# Altium PCB ledbrick.PcbDoc
Units mm, origin at the board's own origin, x right, y up, seen from the top; angles counter-clockwise.
Board outline 81 x 80.5 mm, 2 copper layers (Component Side, Bottom Layer), stack 0.325 mm thick; 43 components, 85 nets, 165 pads, 0 vias.
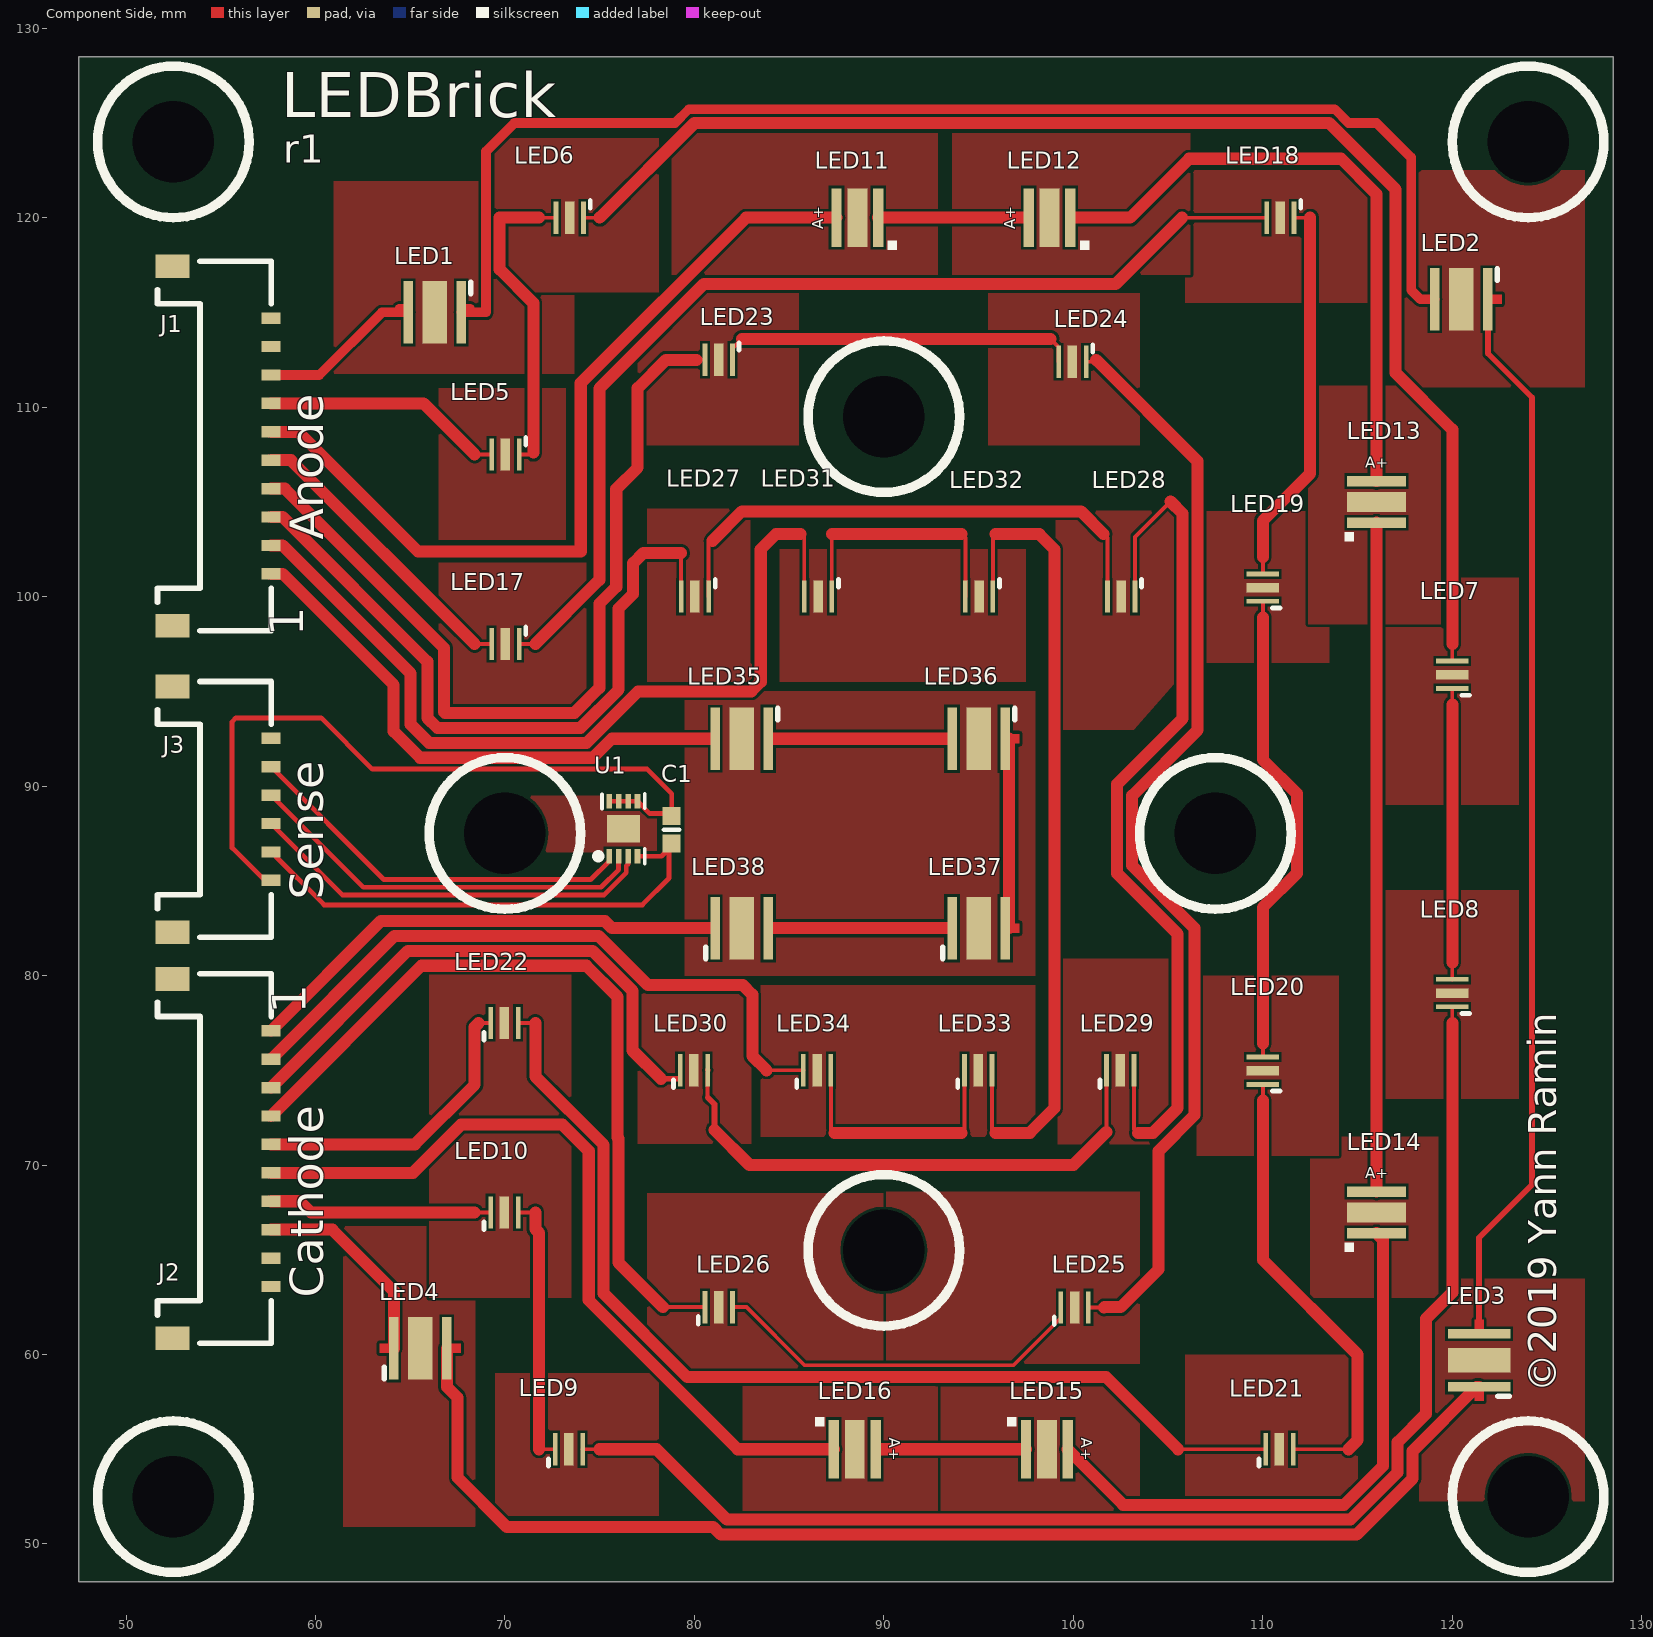
[diagram p0: Component Side view]
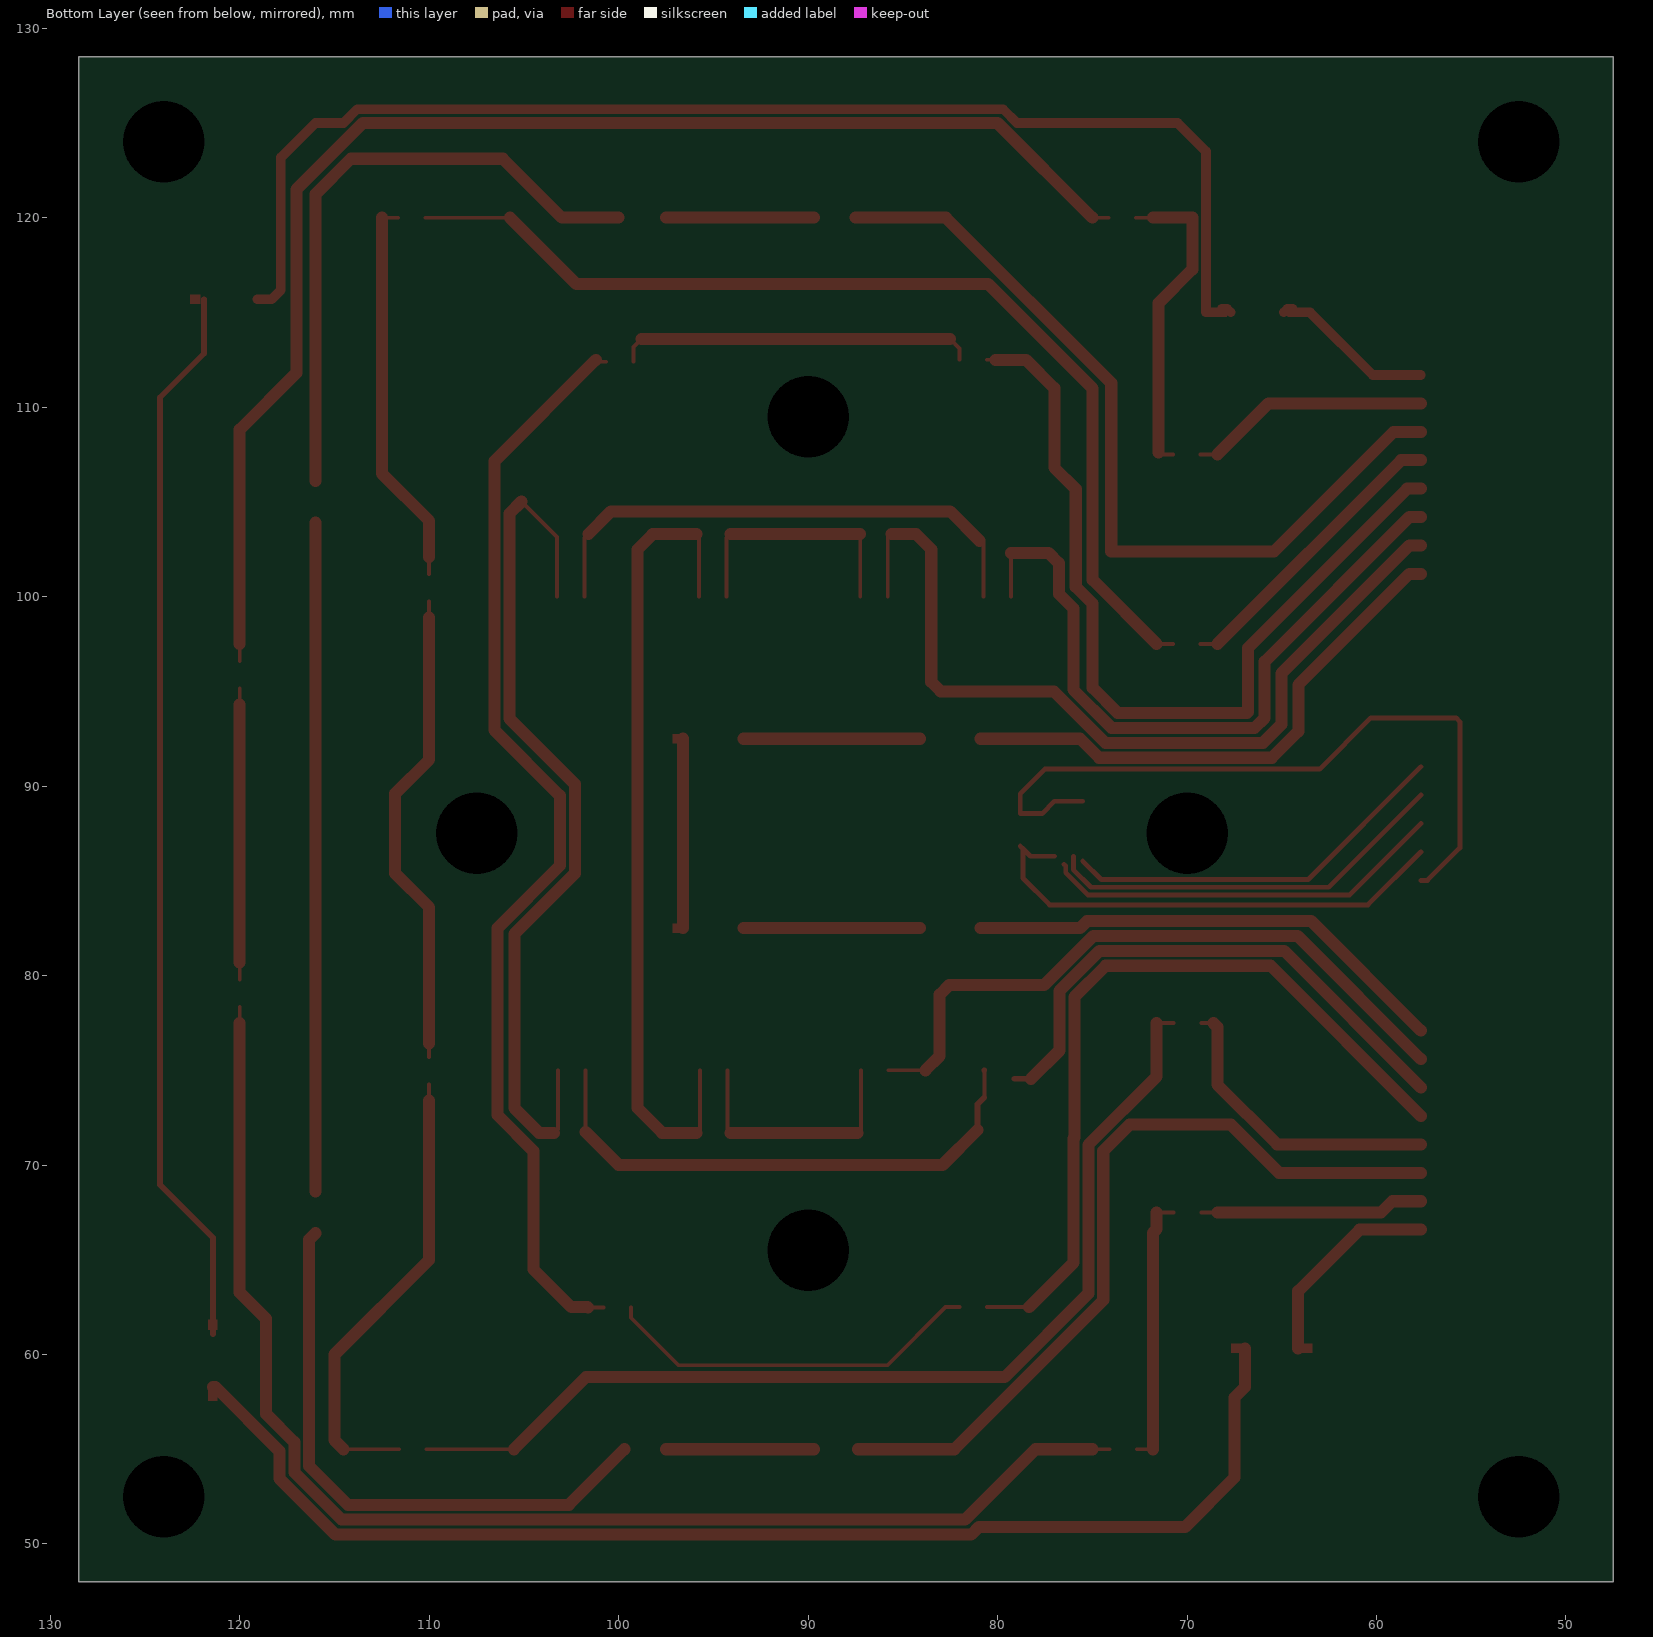
[diagram p1: Bottom Layer view, seen from below]
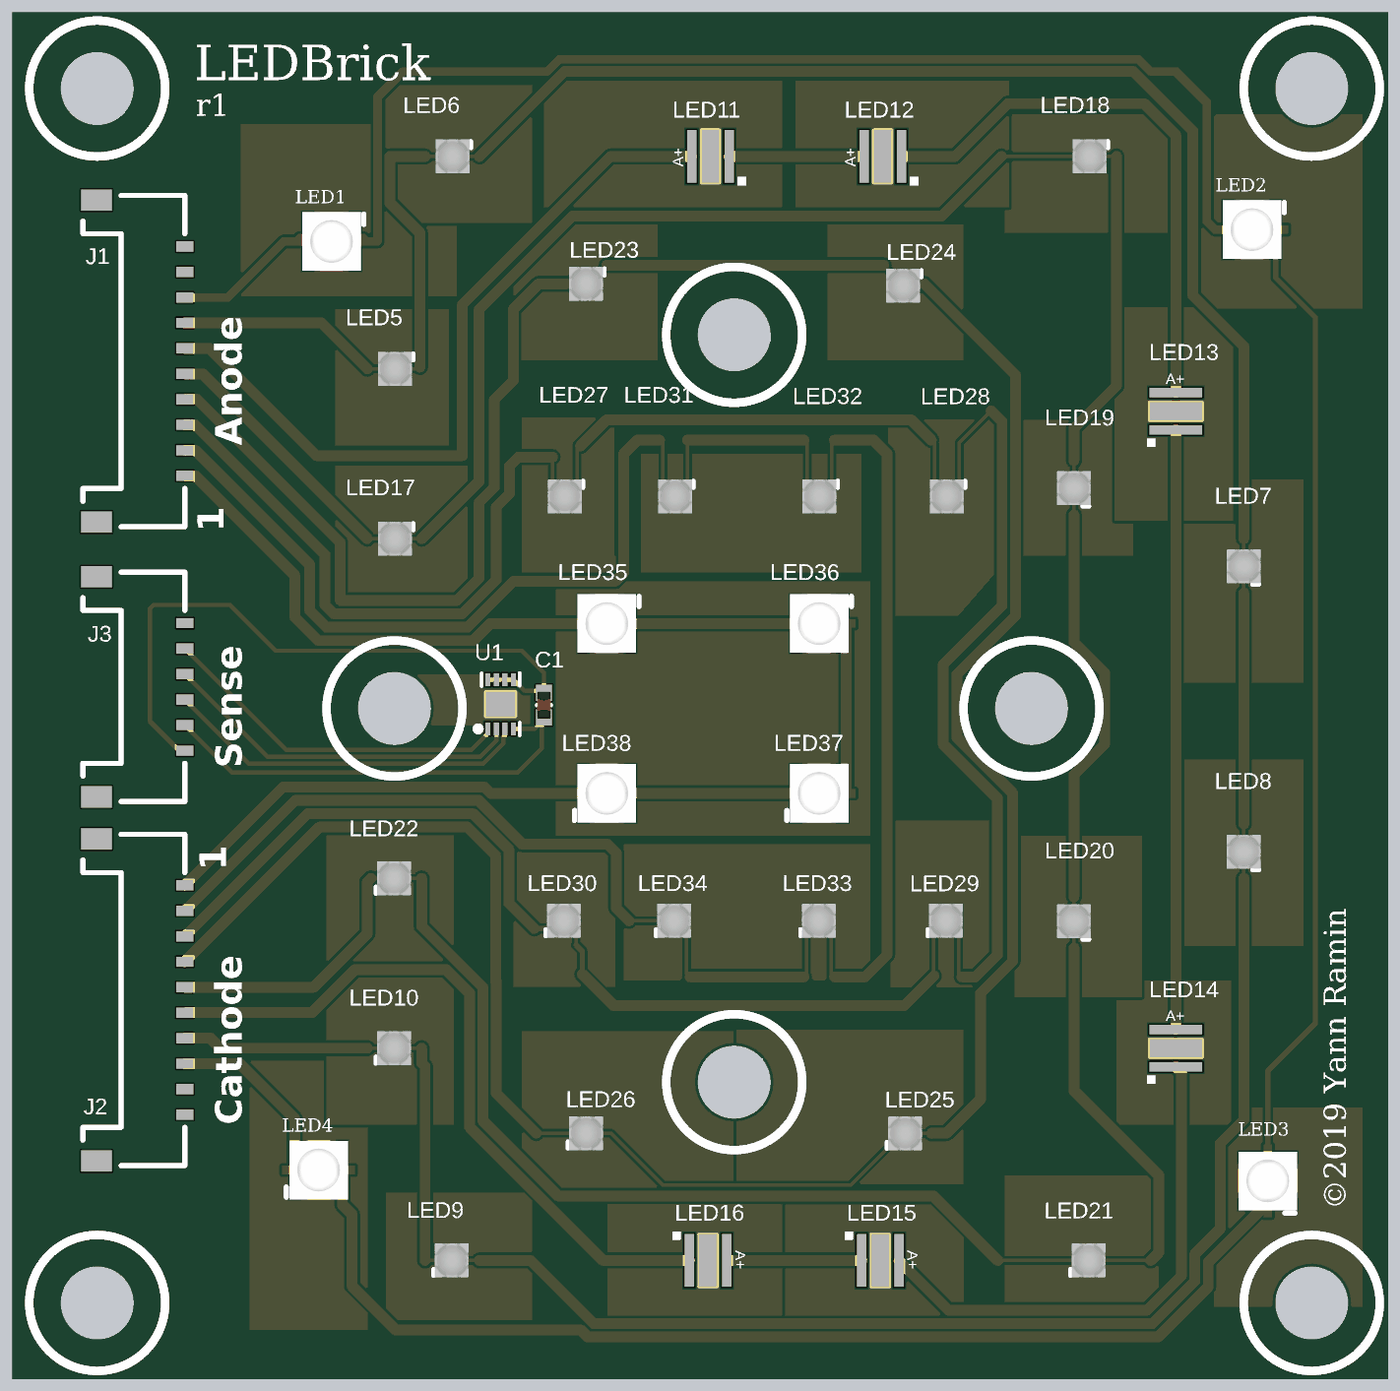
[diagram p2: 3D render of the assembled board from above, using the file's embedded part models]

## Layer stack, top to bottom
Top Solder: solder mask 0.0102, Solder Resist, Dk 3.5
Component Side: signal copper 0.0356
Dielectric 1: core 0.254, FR-4, Dk 4.2
Bottom Layer: signal copper 0.0356
Solder Side: solder mask 0.0102, Solder Resist, Dk 3.5

## Board outline
47.5,48 128.5,48 128.5,128.5 47.5,128.5

## Design rules (kind name [scope] priority, off if disabled: settings)
Clearance [All] p1: gap=0.152 ignorepadtopadclearanceinfootprint=FALSE
NetAntennae NetAntennae_thermal [InNetClass('Thermal')] p1: netantennaetolerance=12.7
NetAntennae [All] p2: netantennaetolerance=0
PolygonConnect DirectThermalPoly [InNetClass('Thermal')] p1: connectstyle=Direct reliefconductorwidth=0.254 reliefentries=4 polygonreliefangle="90 Angle" airgapwidth=0.254
PolygonConnect [All] p2: connectstyle=Relief reliefconductorwidth=0.254 reliefentries=4 polygonreliefangle="90 Angle" airgapwidth=0.254
RoutingVias [All] p1: holewidth=0.711 width=1.27 viastyle="Through Hole" minholewidth=0.711 minwidth=1.27 maxholewidth=0.711 maxwidth=1.27
SolderMaskExpansion [All] p1: expansion=0.102
Width [All] p1: maxlimit=2.54 minlimit=0.203 preferedwidth=0.508 bottomlayer_maxwidth=0.254 bottomlayer_prefwidth=0.254 minimp=50.000000 maximp=50.000000 favimp=50.000000
29 further rules are at their usual default settings.

## Classes and differential pairs
net class Thermal: L1T L2T L3T L4T L5T L6T LT7 LT8 LT9 LT10 LT11 LT12 LT13 LT14 LT15 LT16 LT17 LT18 LT19 LT20 LT21 LT22 LT23 LT24 LT25 LT26 LT27 LT28 LT29 LT30 LT31 LT33 LTG SENSETHERM

## Components (designator, comment, footprint, x,y, rotation, side; value= is the part's Value field where it differs from the comment)
C1 "0.1uF" C0603 78.8,87.7 r270 top
J1 "504050-1091_PICOLOCK" 504050-1091_PICOLOCK 57.658,107.95 r90 top
J2 "504050-1091_PICOLOCK" 504050-1091_PICOLOCK 57.658,70.339 r90 top
J3 "504050-0691_PICOLOCK" 504050-0691_PICOLOCK 57.658,88.773 r90 top
LED1 "Violet" SEMILED_3535 66.294,115 r0 top
LED2 "Violet" SEMILED_3535 120.479,115.697 r0 top
LED3 "Violet" SEMILED_3535 121.412,59.69 r270 top
LED4 "Violet" SEMILED_3535 65.532,60.325 r180 top
LED5 "C_RB" LUXEON_C 70,107.5 r0 top
LED6 "C_RB" LUXEON_C 73.4,120 r0 top
LED7 "C_RB" LUXEON_C 120,95.9 r270 top
LED8 "C_RB" LUXEON_C 120,79.1 r270 top
LED9 "C_RB" LUXEON_C 73.4,55 r180 top
LED10 "C_RB" LUXEON_C 70,67.5 r180 top
LED11 "Square DeepBlue" OSRAM_OSLON_SQUARE 88.6,120 r180 top
LED12 "Square DeepBlue" OSRAM_OSLON_SQUARE 98.74,120 r180 top
LED13 "Square DeepBlue" OSRAM_OSLON_SQUARE 116,105 r90 top
LED14 "Square DeepBlue" OSRAM_OSLON_SQUARE 116,67.5 r90 top
LED15 "Square DeepBlue" OSRAM_OSLON_SQUARE 98.6,55 r0 top
LED16 "Square DeepBlue" OSRAM_OSLON_SQUARE 88.46,55 r0 top
LED17 "LED_THERMAL" LUXEON_C 70,97.5 r0 top
LED18 "LED_THERMAL" LUXEON_C 110.9,120 r0 top
LED19 "LED_THERMAL" LUXEON_C 110,100.5 r270 top
LED20 "LED_THERMAL" LUXEON_C 110,75 r270 top
LED21 "LED_THERMAL" LUXEON_C 110.9,55 r180 top
LED22 "LED_THERMAL" LUXEON_C 70,77.5 r180 top
LED23 "C_MINT" LUXEON_C 81.255,112.5 r0 top
LED24 "C_MINT" LUXEON_C 99.924,112.395 r0 top
LED25 "C_MINT" LUXEON_C 100.089,62.484 r180 top
LED26 "C_MINT" LUXEON_C 81.305,62.5 r180 top
LED27 "C_WHT" LUXEON_C 80,100 r0 top
LED28 "C_WHT" LUXEON_C 102.5,100 r0 top
LED29 "C_WHT" LUXEON_C 102.5,75 r180 top
LED30 "C_WHT" LUXEON_C 80,75 r180 top
LED31 "C_CYAN" LUXEON_C 86.5,100 r0 top
LED32 "C_BLUE" LUXEON_C 95,100 r0 top
LED33 "C_CYAN" LUXEON_C 95,75 r180 top
LED34 "C_BLUE" LUXEON_C 86.5,75 r180 top
LED35 "VIOLET" SEMILED_3535 82.5,92.5 r0 top
LED36 "VIOLET" SEMILED_3535 95,92.5 r0 top
LED37 "VIOLET" SEMILED_3535 95,82.5 r180 top
LED38 "VIOLET" SEMILED_3535 82.5,82.5 r180 top
U1 "MCP9808" DFN8 75.5,86.3 r90 top

## Footprints (in the part's own frame and the unit in brackets; to place one, negate y for a bottom-side part, rotate by r counter-clockwise, add the part's x,y. Pads: shape width x height; smd on the part's side, far side on the other; paste and mask are expansions set on the pad)
504050-0691_PICOLOCK [mm]
  rect 0.6x1 smd: 1(-3.75,0) 2(-2.25,0) 3(-0.75,0) 4(0.75,0) 5(2.25,0) 6(3.75,0)
  rect 1.25x1.8 smd: PAD(-6.48,5.2) PAD(6.48,5.2)
  silkscreen extent -6.75,0 6.75,6
504050-1091_PICOLOCK [mm]
  rect 0.6x1 smd: 1(-6.75,0) 2(-5.25,0) 3(-3.75,0) 4(-2.25,0) 5(-0.75,0) 6(0.75,0) 7(2.25,0) 8(3.75,0) 9(5.25,0) 10(6.75,0)
  rect 1.25x1.8 smd: PAD(-9.48,5.2) PAD(9.48,5.2)
  silkscreen extent -9.75,0 9.75,6
C0603 [mm]
  rect 0.95x0.95 smd: 1(-0.725,0) 2(0.725,0)
  silkscreen extent 0,-0.4 0,0.4, body extent -0.8,-0.4 0.8,0.4, height 0.6
DFN8 [mm]
  rect 0.75x0.3 smd: 1(0,0) 2(0,-0.5) 3(0,-1) 4(0,-1.5) 5(2.9,-1.5) 6(2.9,-1) 7(2.9,-0.5) 8(2.9,0)
  rect 1.45x1.75 smd: PAD(1.45,-0.75)
  silkscreen extent -0.39,-1.88 3.3,0.65
LUXEON_C [mm]
  rect 0.25x1.7 smd mask+0.05: A(-0.7,0) C(0.75,0)
  rect 0.5x1.7 smd mask+0.05: PAD(0.025,0)
  silkscreen extent 1.1,0.5 1.1,0.9, body extent -0.97,-1 1.02,1, height 1.36
OSRAM_OSLON_SQUARE [mm]
  rect 0.55x3.1 smd: A(1.1,0) C(-1.1,0)
  rect 1.05x3.1 smd: PAD(0,0)
  silkscreen extent -2.1,1.2 -1.6,1.7
SEMILED_3535 [mm]
  rect 0.5x3.3 smd: A(-1.4,0) C(1.4,0)
  rect 1.3x3.3 smd: PAD(0,0)
  Component Side region: -2.15,-0.25 -1.6,-0.25 -1.6,0.25 -2.15,0.25
  Component Side region: 1.6,-0.25 2.15,-0.25 2.15,0.25 1.6,0.25
  silkscreen extent 1.9,1 1.9,1.6, body extent -1.73,-1.72 1.72,1.73, height 2.01

## Part data
C1: library part C-EU
LED1 LED2 LED3 LED4 LED5 LED6 LED7 LED8 LED9 LED10 LED11 LED12 LED13 LED14 LED15 LED16 LED23 LED24 LED25 LED26 LED27 LED28 LED29 LED30 LED31 LED32 LED33 LED34 LED35 LED36 LED37 LED38: library part LED_THERMAL

## Free pads (board coordinates)
  rect 0x0 hole 4.3 unplated: ""(52.5,52.5) ""(52.5,124) ""(70,87.5) ""(90,65.5) ""(90,109.5) ""(107.5,87.5) ""(124,52.5) ""(124,124)

## Nets (pads, with @x,y where several pads share a name; then routed paths per layer and width w, separated by ;. In a path a pad name is that pad's centre, name@x,y a point inside that pad or via, vN(x,y) a via of type N, cw(c..) or ccw(c..) an arc to the next point about the centre after c; other vN are vias at no path point)
L1T: LED1.PAD
L2T: LED2.PAD
L3T: LED3.PAD
L4T: LED4.PAD
L5T: LED5.PAD
L6T: LED6.PAD
LT7: LED7.PAD
LT8: LED8.PAD
LT9: LED9.PAD
LT10: LED10.PAD
LT11: LED11.PAD
LT12: LED12.PAD
LT13: LED13.PAD
LT14: LED14.PAD
LT15: LED15.PAD
LT16: LED16.PAD
LT17: LED17.PAD
LT18: LED18.PAD
LT19: LED19.PAD
LT20: LED20.PAD
LT21: LED21.PAD
LT22: LED22.PAD
LT23: LED23.PAD
LT24: LED24.PAD
LT25: LED25.PAD
LT26: LED26.PAD
LT27: LED27.PAD
LT28: LED28.PAD
LT29: LED29.PAD
LT30: LED30.PAD
LT31: LED31.PAD LED32.PAD
LT33: LED33.PAD LED34.PAD
LTG: LED35.PAD LED36.PAD LED37.PAD LED38.PAD
NetC1_1: C1.1 J3.1 U1.5 U1.6 U1.7 U1.8 | length 39
  Component Side w0.254: J3.1 57.317,85.023 55.6,86.74 55.6,93.4 55.8,93.6 60.3,93.6 63,90.9 77.5,90.9 78.8,89.6 78.8,88.55 77.65,88.55 U1.5 U1.6 U1.7 U1.8
NetC1_2: C1.2 J3.2 U1.4 | length 26.3
  Component Side w0.254: J3.2 60.452,83.729 77.252,83.729 78.659,85.136 C1.2@78.659,86.695 ; U1.4 78.264,86.3 C1.2@78.659,86.695 ; C1.2@78.8,86.836 C1.2@78.659,86.695
NetJ1_1: J1.1 LED35.A | length 29.1
  Component Side w0.635: J1.1 58.27,101.2 64.127,95.343 64.127,92.896 65.525,91.497 74.638,91.497 75.641,92.5 LED35.A@80.9,92.5
NetJ1_2: J1.2 LED31.A | length 45.9
  Component Side w0.203: 85.6,103.3 85.8,103.1 LED31.A
  Component Side w0.635: J1.2 58.27,102.7 65.016,95.954 65.016,93.264 65.995,92.284 74.311,92.284 77.027,95 83,95 83.5,95.5 83.5,102.5 84.3,103.3 85.6,103.3
NetJ1_3: J1.3 LED27.A | length 37.6
  Component Side w0.203: LED27.A 79.3,102.3
  Component Side w0.635: J1.3 58.27,104.2 65.905,96.565 65.905,93.595 66.428,93.072 73.985,93.072 76,95.086 76,99.385 76.763,100.148 76.763,101.763 77.3,102.3 79.3,102.3
NetJ1_4: J1.4 LED23.A | length 45.6
  Component Side w0.203: 80.1,112.5 LED23.A
  Component Side w0.635: J1.4 58.378,105.7 66.794,97.285 66.794,93.906 66.841,93.859 73.659,93.859 74.985,95.185 74.985,99.627 75.874,100.516 75.874,105.681 77,106.808 77,111 78.5,112.5 80.1,112.5
NetJ1_5: J1.5 LED17.A | length 15.7
  Component Side w0.203: 68.4,97.5 LED17.A
  Component Side w0.635: J1.5 58.7,107.2 68.4,97.5
NetJ1_6: J1.6 LED11.A | length 45
  Component Side w0.635: J1.6 59.094,108.7 65.404,102.389 74,102.389 74,111.272 82.728,120 LED11.A
NetJ1_7: J1.7 LED5.A | length 12.8
  Component Side w0.203: 68.4,107.5 LED5.A
  Component Side w0.635: J1.7 65.7,110.2 68.4,107.5
NetJ1_8: J1.8 LED1.A | length 8.7
  Component Side w0.508: J1.8 60.2,111.7 63.5,115 64.419,115 ; 64.419,115.192 64.702,115.192 LED1.A
NetJ2_3: J2.3 LED4.C | length 10.8
  Component Side w0.635: J2.3 60.887,66.589 64.132,63.344 LED4.C
NetJ2_4: J2.4 LED10.C | length 11.8
  Component Side w0.203: 68.4,67.5 LED10.C
  Component Side w0.635: J2.4 59.165,68.089 59.754,67.5 68.4,67.5
NetJ2_5: J2.5 LED16.C | length 42.5
  Component Side w0.635: J2.5 65.144,69.589 67.691,72.136 73.025,72.136 74.422,70.739 74.422,62.865 82.287,55 LED16.C
NetJ2_6: J2.6 LED22.C | length 16.1
  Component Side w0.203: 68.61,77.5 68.707,77.597 68.804,77.5 LED22.C
  Component Side w0.635: J2.6 65.247,71.089 68.4,74.242 68.4,77.29 68.61,77.5
NetJ2_7: J2.7 LED26.C | length 41.8
  Component Side w0.203: 78.343,62.5 LED26.C
  Component Side w0.635: J2.7 65.587,80.518 74.295,80.518 75.946,78.867 75.946,71.442 75.997,71.391 75.997,64.846 78.343,62.5
NetJ2_8: J2.8 LED30.C | length 29.1
  Component Side w0.305: 78.232,74.549 79.1,74.549
  Component Side w0.635: J2.8 64.874,81.305 74.621,81.305 76.733,79.193 76.733,76.048 78.232,74.549
NetJ2_9: J2.9 LED34.C | length 35.6
  Component Side w0.203: 83.816,75 LED34.C
  Component Side w0.635: J2.9 64.162,82.093 74.947,82.093 77.538,79.502 82.55,79.502 83.058,78.994 83.058,75.758 83.816,75
NetJ2_10: J2.10 LED38.C | length 25.8
  Component Side w0.635: J2.10 63.449,82.88 75.273,82.88 75.654,82.5 LED38.C@80.9,82.5
NetJ3_3: J3.3 U1.3 | length 21.3
  Component Side w0.254: J3.3 61.423,84.258 75.237,84.258 76.406,85.427 76.406,85.786 76.5,85.88
NetJ3_4: J3.4 U1.2 | length 21.4
  Component Side w0.254: J3.4 62.517,84.664 75.069,84.664 76,85.595 U1.2
NetJ3_5: J3.5 U1.1 | length 20.7
  Component Side w0.254: J3.5 63.61,85.071 74.53,85.071 U1.1@75.5,86.041
NetLED1_C: LED1.C LED2.A | length 69.1
  Component Side w0.508: LED1.C 67.886,115.192 68.169,115.192 ; 68.169,115 69,115 69,123.5 70.5,125 78.976,125 79.7,125.724 113.8,125.724 114.524,125 116,125 117.825,123.175 117.825,116.175 118.303,115.697 LED2.A
NetLED2_C: LED2.C LED3.A | length 56.7
  Component Side w0.305: LED3.A 121.412,66.167 124.206,68.961 124.206,110.512 121.879,112.839 LED2.C
NetLED3_C: LED3.C LED4.A | length 66.3
  Component Side w0.635: LED4.A 66.932,58.29 67.5,57.722 67.5,53.5 70.1,50.9 80.986,50.9 81.391,50.495 114.946,50.495 117.907,53.456 117.907,54.907 121.29,58.29 LED3.C
NetLED5_C: LED5.C LED6.A | length 16.9
  Component Side w0.203: LED5.C 71.4,107.5 71.5,107.6 ; 71.8,120 LED6.A
  Component Side w0.635: 71.5,107.6 71.5,115.5 69.724,117.276 69.724,120 71.8,120
NetLED6_C: LED6.C LED7.A | length 72.5
  Component Side w0.203: LED6.C 75,120 ; LED7.A 120,97.5
  Component Side w0.635: 75,120 80,125 113.5,125 117,121.5 117,111.815 120,108.815 120,97.5
NetLED7_C: LED7.C LED8.A | length 15.3
  Component Side w0.203: LED8.A 120,80.7 ; 120,94.3 LED7.C
  Component Side w0.635: 120,80.7 120,94.3
NetLED8_C: LED8.C LED9.A | length 71.4
  Component Side w0.203: LED9.A 75,55 ; 120,77.5 LED8.C
  Component Side w0.635: 75,55 78,55 81.717,51.283 114.619,51.283 117.119,53.783 117.119,55.377 118.611,56.868 118.611,61.888 120,63.277 120,77.5
NetLED9_C: LED9.C LED10.A | length 14.3
  Component Side w0.203: LED10.A 71.6,67.5 ; 71.8,55 LED9.C
  Component Side w0.635: 71.6,67.5 71.6,66.622 71.8,66.422 71.8,55
NetLED11_C: LED11.C LED12.A | length 7.8
  Component Side w0.635: LED11.C LED12.A@97.5,120
NetLED12_C: LED12.C LED13.A | length 33.2
  Component Side w0.635: LED12.C@100,120 103,120 106.111,123.111 114.132,123.111 116,121.243 LED13.A
NetLED13_C: LED13.C LED14.A | length 35.3
  Component Side w0.635: LED14.A LED13.C
NetLED14_C: LED14.C LED15.A | length 31.1
  Component Side w0.635: LED15.A 102.63,52.07 114.293,52.07 116.332,54.109 116.332,66.068 LED14.C
NetLED15_C: LED15.C LED16.A | length 7.8
  Component Side w0.635: LED16.A@89.7,55 LED15.C
NetLED17_C: LED17.C LED18.A | length 54.7
  Component Side w0.203: LED17.C 71.6,97.5 ; 105.731,120 LED18.A
  Component Side w0.635: 71.6,97.5 74.985,100.884 74.985,110.984 80.5,116.5 102.231,116.5 105.731,120
NetLED18_C: LED18.C LED19.A | length 20.7
  Component Side w0.203: LED19.A 110,102.1 ; LED18.C 112.5,120
  Component Side w0.635: 110,102.1 110,104 112.5,106.5 112.5,120
NetLED19_C: LED19.C LED20.A | length 25.5
  Component Side w0.203: LED20.A 110,76.417 ; 110,98.9 LED19.C
  Component Side w0.635: 110,76.417 110,83.6 111.8,85.4 111.8,89.6 110,91.4 110,98.9
NetLED20_C: LED20.C LED21.A | length 24.4
  Component Side w0.203: 110,73.4 LED20.C ; LED21.A 114.521,55
  Component Side w0.635: 110,73.4 110,65 115,60 115,55.479 114.521,55
NetLED21_C: LED21.C LED22.A | length 55
  Component Side w0.203: LED22.A 71.6,77.5 ; 105.528,55 LED21.C
  Component Side w0.635: 71.6,77.5 71.6,74.675 75.209,71.065 75.209,63.221 79.629,58.801 101.727,58.801 105.528,55
NetLED23_C: LED23.C LED24.A | length 19
  Component Side w0.203: LED23.C 82.005,113.105 82.5,113.6 ; 98.8,113.6 99.224,113.176 LED24.A
  Component Side w0.635: 82.5,113.6 98.8,113.6
NetLED24_C: LED24.C LED25.A | length 58.9
  Component Side w0.203: LED24.C 101.095,112.395 101.2,112.5 ; LED25.A 101.627,62.484
  Component Side w0.635: 101.2,112.5 106.553,107.147 106.553,92.953 103.1,89.5 103.1,85.8 106.389,82.511 106.389,72.632 104.5,70.743 104.5,64.5 102.5,62.5 101.643,62.5 101.627,62.484
NetLED25_C: LED25.C LED26.A | length 20.2
  Component Side w0.203: LED26.A 82.741,62.5 85.805,59.436 96.836,59.436 99.339,61.939 LED25.C
NetLED27_C: LED27.C LED28.A | length 28.3
  Component Side w0.203: LED27.C 80.75,102.95 80.95,102.95 ; 101.6,103.3 101.8,103.1 LED28.A
  Component Side w0.635: 80.95,102.95 82.5,104.5 100.4,104.5 101.6,103.3
NetLED28_C: LED28.C LED29.A | length 46.9
  Component Side w0.203: LED29.A 103.2,71.9 103.4,71.7 ; LED28.C 103.25,103.15 105.124,105.024
  Component Side w0.635: 103.4,71.7 104.2,71.7 105.5,73 105.5,82.2 102.313,85.387 102.313,90.113 105.766,93.566 105.766,104.383 105.124,105.024
NetLED29_C: LED29.C LED30.A | length 28.7
  Component Side w0.203: 80.698,73.569 LED30.A@80.698,74.998 ; 101.75,71.75 LED29.C
  Component Side w0.305: 80.698,73.569 81.054,73.213 81.054,71.854 ; LED30.A@80.698,74.998 LED30.A
  Component Side w0.635: 81.054,71.854 82.908,70 100,70 101.75,71.75
NetLED31_C: LED31.C LED32.A | length 13.5
  Component Side w0.203: LED31.C 87.25,103.3 ; 94.1,103.3 94.3,103.1 LED32.A
  Component Side w0.635: 87.25,103.3 94.1,103.3
NetLED32_C: LED32.C LED33.A | length 43.3
  Component Side w0.203: LED33.A 95.7,71.9 95.9,71.7 ; LED32.C 95.75,103.15 95.9,103.3
  Component Side w0.635: 95.9,71.7 97.7,71.7 99,73 99,102.5 98.2,103.3 95.9,103.3
NetLED33_C: LED33.C LED34.A | length 13.4
  Component Side w0.203: LED34.A 87.2,71.9 87.4,71.7 ; 94.1,71.7 94.25,71.85 LED33.C
  Component Side w0.635: 87.4,71.7 94.1,71.7
NetLED35_C: LED35.C LED36.A | length 9.3
  Component Side w0.635: LED35.C@84.1,92.5 LED36.A@93.4,92.5
NetLED36_C: LED36.C LED37.A | length 10
  Component Side w0.635: LED37.A@96.6,82.5 LED36.C@96.6,92.5
NetLED37_C: LED37.C LED38.A | length 9.3
  Component Side w0.635: LED38.A@84.1,82.5 LED37.C@93.4,82.5
SENSETHERM: U1.PAD
pads on no net: J1.9 J1.10 J1.PAD J2.1 J2.2 J2.PAD J3.6 J3.PAD

## Polygon pours and split planes (outlines as drawn)
L4T on Component Side (solid, pour order 67): 61.468,66.76 68.427,66.76 68.427,50.927 68.4,50.9 61.468,50.9
L3T on Component Side (solid, pour order 65): 118.245,64.008 127,64.008 127,52.269 118.245,52.269
L2T on Component Side (solid, pour order 63): 117.348,111.043 126.951,111.043 127,110.995 127,122.5 118.375,122.5 117.348,121.473
L1T on Component Side (solid, pour order 61): 60.96,121.92 73.659,121.92 73.659,111.76 60.96,111.76
LT10 on Component Side "Top Layer-No Net" (solid, pour order 43): 66,72 73.5,72 73.5,63 66,63 66,72
SENSETHERM on Component Side "Top Layer-No Net" (solid, pour order 44): 70.4,89.5 78,89.5 78,86.5 70.4,86.5
L5T on Component Side "Top Layer-No Net" (solid, pour order 31): 66.5,111 73.207,111 73.207,103 66.5,103 66.5,111
L6T on Component Side "Top Layer-No Net" (solid, pour order 32): 69.469,124.206 78.105,124.206 78.105,116.078 69.469,116.078
LT11 on Component Side "Top Layer-No Net" (solid, pour order 33): 78.8,124.46 92.837,124.46 92.837,117 78.8,117
LT12 on Component Side "Top Layer-No Net" (solid, pour order 34): 93.6,124.46 106.178,124.46 106.178,117 93.6,117
LT18 on Component Side "Top Layer-No Net" (solid, pour order 35): 105.918,122.5 114,122.5 116,122.5 116,115.5 105.918,115.5
LT23 on Component Side "Top Layer-No Net" (solid, pour order 36): 85.5,116 77,116 77,108 85.5,108 85.5,116
LT24 on Component Side "Top Layer-No Net" (solid, pour order 37): 95.5,116 103.5,116 103.5,108 95.5,108 95.5,116
LTG on Component Side "Top Layer-No Net" (solid, pour order 38): 79.5,95 98,95 98,80 79.5,80 79.5,95
LT27 on Component Side "Top Layer-No Net" (solid, pour order 39): 77.5,104.648 82.955,104.648 82.955,96.5 83.5,96 82.955,95.5 77.5,95.5
LT31 on Component Side "Top Layer-No Net" (solid, pour order 40): 84.5,102.5 97.5,102.5 97.5,95.5 84.5,95.5 84.5,102.5
LT17 on Component Side "Top Layer-No Net" (solid, pour order 41): 66.5,101.8 74.3,101.8 74.3,93 66.5,93 66.5,101.8
LT22 on Component Side "Top Layer-No Net" (solid, pour order 42): 66,80.5 73.5,80.5 73.5,72.5 66,72.5 66,80.5
LT33 on Component Side "Top Layer-No Net" (solid, pour order 45): 83.5,79.5 98,79.5 98,72 97.5,71.5 83.5,71.5 83.5,79.5
LT30 on Component Side "Top Layer-No Net" (solid, pour order 46): 77,79.5 83,79.5 83,71.12 77,71.12
LT13 on Component Side "Top Layer-No Net" (solid, pour order 47): 112.395,111.125 119.38,111.125 119.38,98.552 112.395,98.552
LT19 on Component Side "Top Layer-No Net" (solid, pour order 48): 106,104.5 113.5,104.5 113.5,96.5 106,96.5
LT7 on Component Side "Top Layer-No Net" (solid, pour order 49): 116.332,101 123.5,101 123.5,89.027 116.332,89.027
LT8 on Component Side "Top Layer-No Net" (solid, pour order 50): 116.5,84.5 123.5,84.5 123.5,73.5 116.5,73.5
LT20 on Component Side "Top Layer-No Net" (solid, pour order 51): 106.5,80 114,80 114,70.5 106.5,70.5
LT14 on Component Side "Top Layer-No Net" (solid, pour order 52): 119.253,71.5 112.5,71.5 112.5,63 119.253,63
LT21 on Component Side "Top Layer-No Net" (solid, pour order 53): 105.918,60 115,60 115,52.5 105.918,52.5
LT15 on Component Side "Top Layer-No Net" (solid, pour order 54): 92.964,58.293 103.505,58.293 103.505,51.762 92.964,51.762
LT25 on Component Side "Top Layer-No Net" (solid, pour order 55): 90.127,68.58 103.5,68.58 103.5,59.5 90.127,59.5
LT16 on Component Side "Top Layer-No Net" (solid, pour order 56): 82.55,58.42 92.837,58.42 92.837,51.5 82.55,51.5
LT26 on Component Side "Top Layer-No Net" (solid, pour order 57): 77.5,68.502 90.127,68.502 90.127,59 78.107,59 77.5,59.533
LT9 on Component Side "Top Layer-No Net" (solid, pour order 58): 69.5,59 78.105,59 78.105,51.5 69.5,51.5
LT29 on Component Side "Top Layer-No Net" (solid, pour order 59): 99.187,80.899 105,80.899 105,71.089 99.187,71.089
LT28 on Component Side "Top Layer-No Net" (solid, pour order 60): 99.06,104.531 105.5,104.531 105.5,95.622 105.461,95.577 103.196,92.964 99.06,92.964

## Silkscreen, mask and mechanical layers (free items; w line width, h text height)
Top Overlay:
  circle w0.5: c90,109.5 r4
  circle w0.5: c70,87.5 r4
  circle w0.5: c107.5,87.5 r4
  circle w0.5: c90,65.5 r4
  circle w0.5: c52.5,52.5 r4
  circle w0.5: c52.5,124 r4
  circle w0.5: c124,124 r4
  circle w0.5: c124,52.5 r4
  text "LEDBrick" at 58.2,124.5 h4.06
  text "r1" at 58.3,122.4 h2.54
  text "Anode" at 61,103 h3.05 r90
  text "1" at 59.944,97.917 h3.05 r90
  text "Sense" at 61,84 h3.05 r90
  text "1" at 60.071,77.978 h3.05 r90
  text "Cathode" at 61,63 h3.05 r90
  text "©2019 Yann Ramin" at 126,58 h2.54 r90
Mechanical 1:
  the board outline again, w0.254

## Text inside footprints (layer, text, board x,y; h text height)
LED11: Top Overlay "A+" at 87,119.4 h1 r90
LED12: Top Overlay "A+" at 97.14,119.4 h1 r90
LED13: Top Overlay "A+" at 115.4,106.6 h1
LED14: Top Overlay "A+" at 115.4,69.1 h1
LED15: Top Overlay "A+" at 100.2,55.6 h1 r270
LED16: Top Overlay "A+" at 90.06,55.6 h1 r270